# EAGLE board KV4QB DL WattMeter (EAGLE 7.0.0)
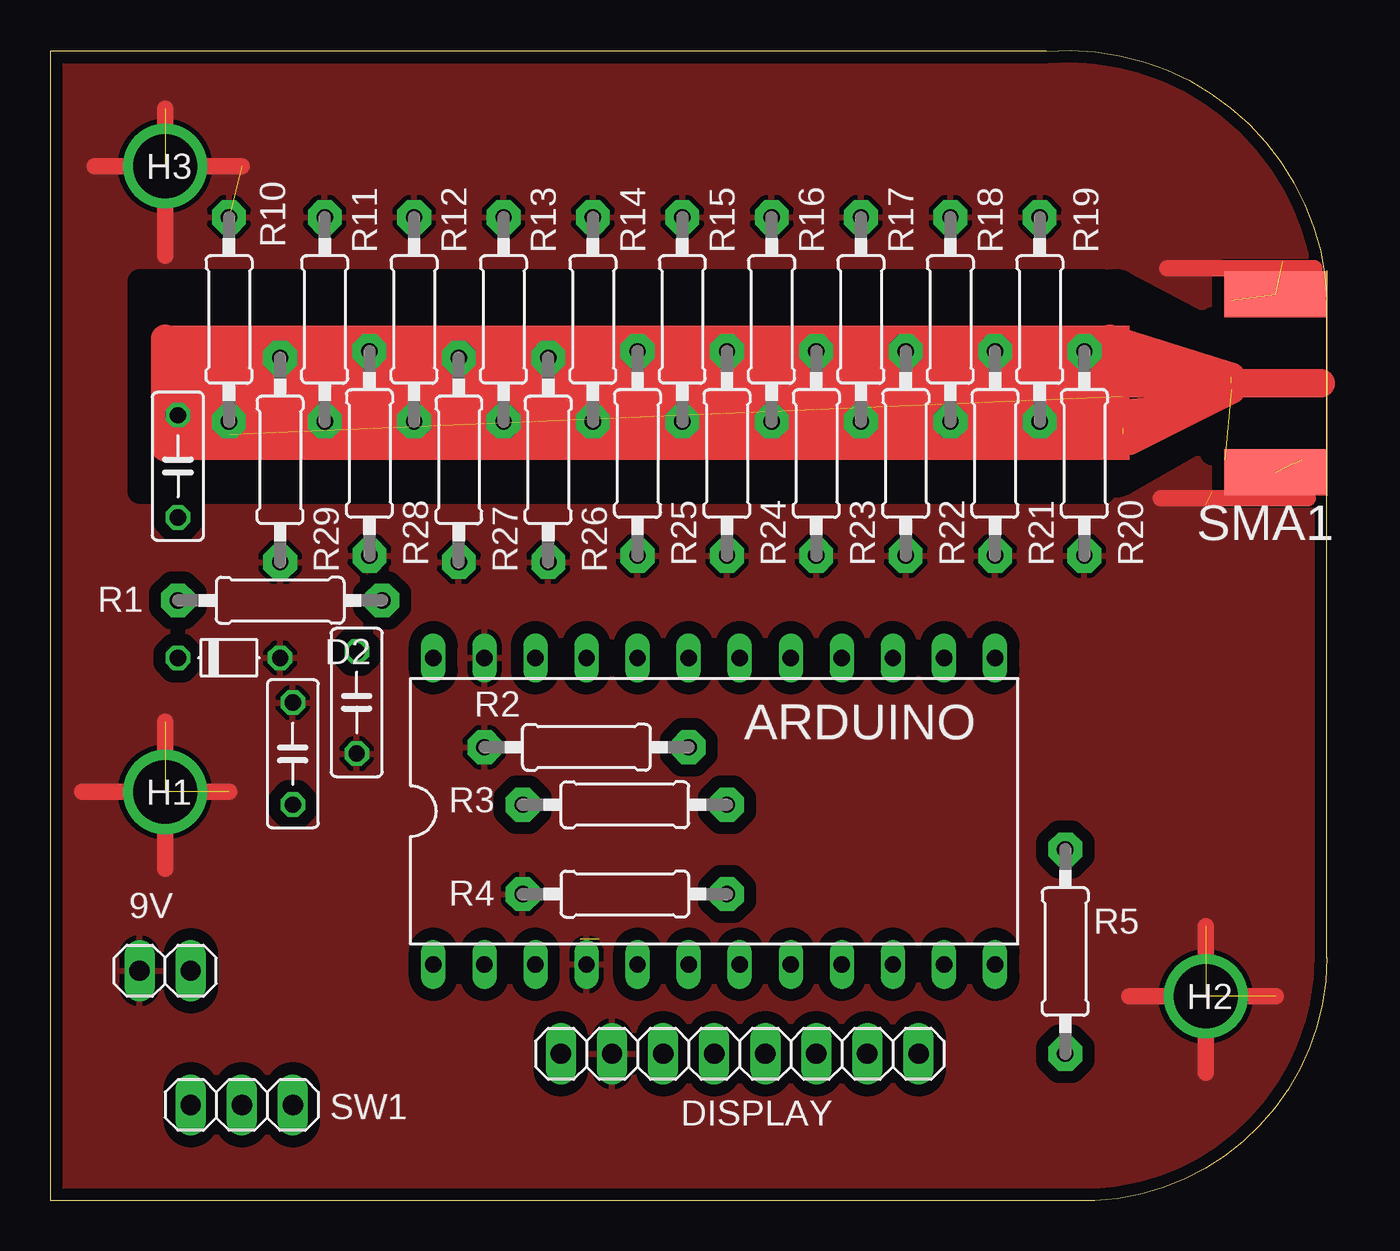
[diagram p0: board, top side]
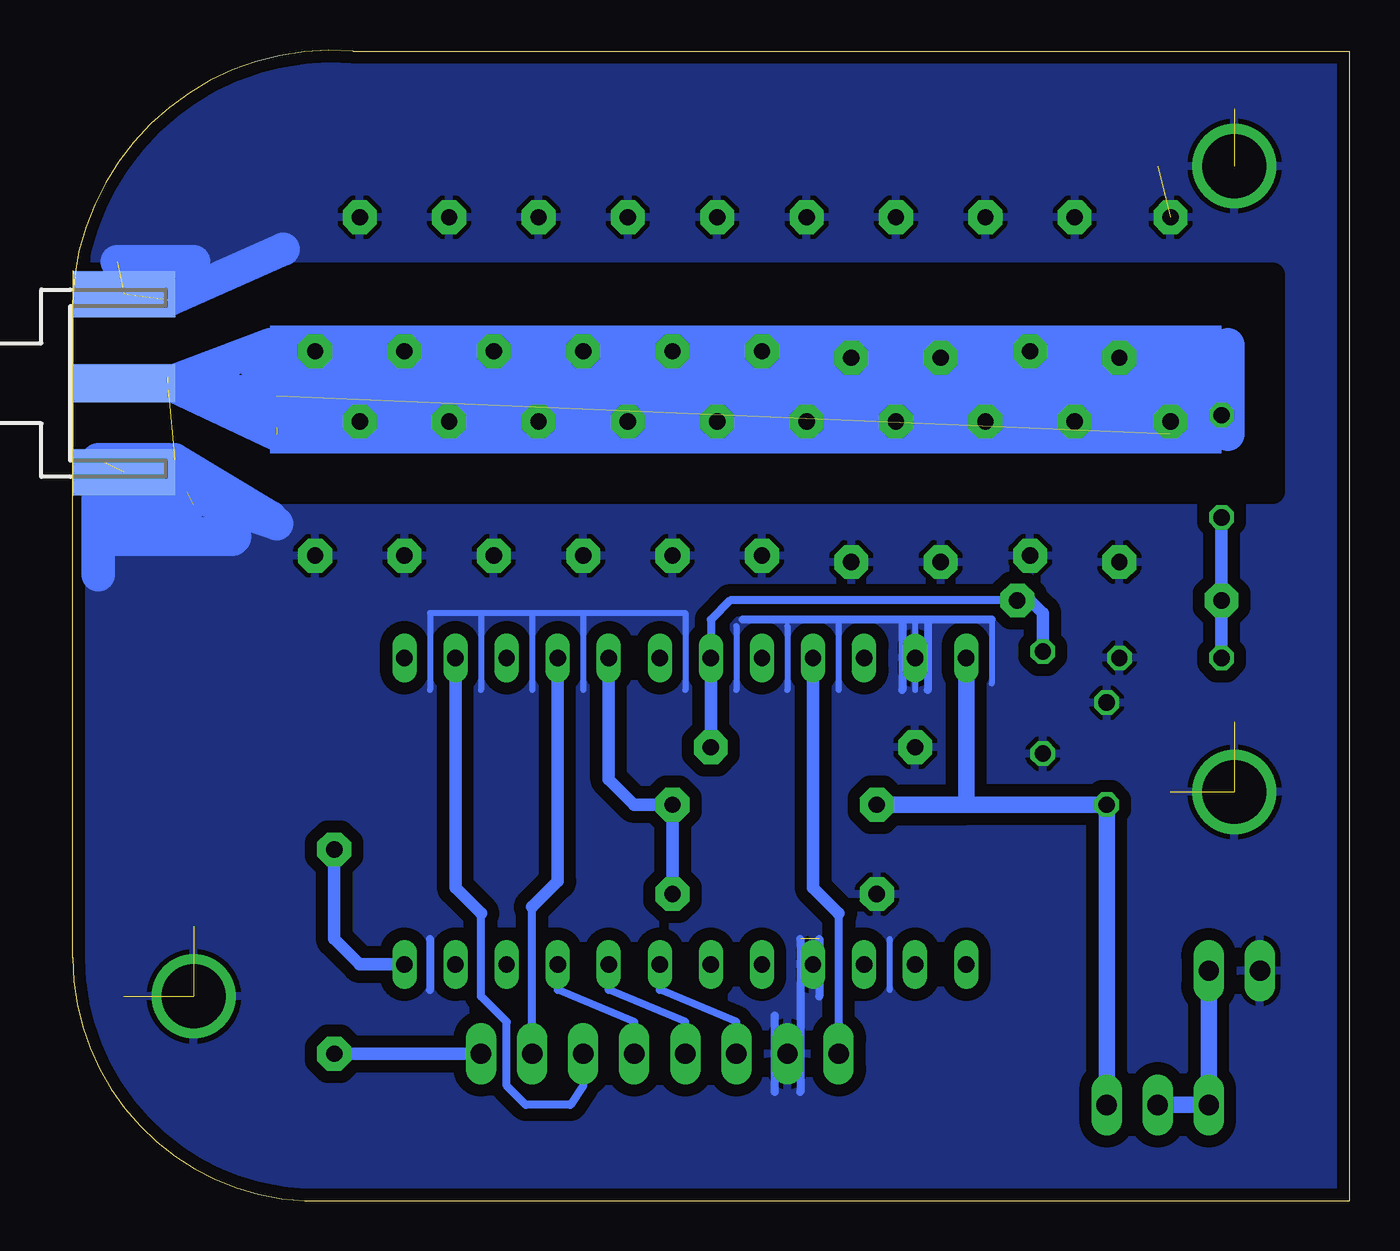
[diagram p1: board, bottom side, seen from below]

Size 63.5 x 57.2 mm. Coordinates in mm from the lower left corner, seen from the top.
Outline: 0,57.15 0,0 50.8,0 arc93 63.5,12.07 63.5,44.77 arc93 49.53,57.15 0,57.15
Copper layers (1*16): Top 0.0356mm / dielectric 1.5011mm / Bottom 0.0356mm
Design rules "LaenPCBOrder": minimum track width 6mil, minimum drill 13mil, track to track 6mil, track to pad 6mil, pad to pad 6mil, via to via 6mil, smd to smd 6mil, copper to edge 15mil, drill to drill 6mil, minimum pad ring 7mil, minimum via ring 7mil, stop-mask expansion 3mil, vias tented up to drill 0mil, thermal gap 10mil
tRestrict: area 57.8,37.1 to 63.2,43.8; area 4.4,35.2 to 52.4,45.7; 3 lines
bRestrict: area 3.8,35.2 to 62.2,46

## Footprints (pad centres in the part's own frame; a part is rotated, then mirrored left to right if it is on the bottom)
1X02 = drill 1.016 long: 1 -1.27,0; 2 1.27,0
DIL24-6 = drill 0.813 long: 1 -13.97,-7.62; 2 -11.43,-7.62; 3 -8.89,-7.62; 4 -6.35,-7.62; 5 -3.81,-7.62; 6 -1.27,-7.62; 7 1.27,-7.62; 8 3.81,-7.62; 9 6.35,-7.62; 10 8.89,-7.62; 11 11.43,-7.62; 12 13.97,-7.62; 13 13.97,7.62; 14 11.43,7.62; 15 8.89,7.62; 16 6.35,7.62; 17 3.81,7.62; 18 1.27,7.62; 19 -1.27,7.62; 20 -3.81,7.62; 21 -6.35,7.62; 22 -8.89,7.62; 23 -11.43,7.62; 24 -13.97,7.62
C050-025X075 = drill 0.813 octagon: 1 -2.54,0; 2 2.54,0
D-5 = drill 0.813 octagon: A 2.54,0; C -2.54,0
1X08 = drill 1.016 long: 1 -8.89,0; 2 -6.35,0; 3 -3.81,0; 4 -1.27,0; 5 1.27,0; 6 3.81,0; 7 6.35,0; 8 8.89,0
PAD_0.1250 = drill 3.175 pad 3.175: 1 0,0
0207/10 = drill 0.813 pad 1.676 octagon: 1 -5.08,0; 2 5.08,0
J502-ND-142-0711-871/876 = smd 5.08 x 1.905: 1 2.565,0 | smd 5.08 x 2.286: G@1 2.565,4.42; G@2 2.565,-4.42 | smd 5.08 x 2.286 bottom: G@3 2.565,4.42; G@4 2.565,-4.42
1X03 = drill 1.016 long: 1 -2.54,0; 2 0,0; 3 2.54,0

## Placement (x,y rotation side)
9V  [1X02]  5.71,11.43 180 top
ARDUINO  pro-mini  [DIL24-6]  33.02,19.37 0 top
C1  .1uf  [C050-025X075]  12.06,22.23 270 top
C4  .1uf  [C050-025X075]  15.24,24.77 90 top
C11  .001uf  [C050-025X075]  6.35,36.51 90 top
D2  1N60P  [D-5]  8.89,26.99 0 top
DISPLAY  [1X08]  34.29,7.3 0 top
H1  [PAD_0.1250]  5.71,20.32 0 top
H2  [PAD_0.1250]  57.47,10.16 0 top
H3  [PAD_0.1250]  5.71,51.44 0 top
R1  680K  [0207/10]  11.43,29.85 180 top
R2  68K  [0207/10]  26.67,22.54 0 top
R3  4K7  [0207/10]  28.57,19.69 0 top
R4  1k  [0207/10]  28.57,15.24 180 top
R5  100R  [0207/10]  50.48,12.38 90 top
R10  1K  [0207/10]  8.89,43.82 90 top
R11  1K  [0207/10]  13.65,43.82 90 top
R12  1K  [0207/10]  18.1,43.82 90 top
R13  1K  [0207/10]  22.54,43.82 90 top
R14  1K  [0207/10]  26.99,43.82 90 top
R15  1K  [0207/10]  31.43,43.82 90 top
R16  1K  [0207/10]  35.88,43.82 90 top
R17  1K  [0207/10]  40.32,43.82 90 top
R18  1K  [0207/10]  44.77,43.82 90 top
R19  1K  [0207/10]  49.21,43.82 90 top
R20  1K  [0207/10]  51.44,37.15 90 top
R21  1K  [0207/10]  46.99,37.15 90 top
R22  1K  [0207/10]  42.55,37.15 90 top
R23  1K  [0207/10]  38.1,37.15 90 top
R24  1K  [0207/10]  33.66,37.15 90 top
R25  1K  [0207/10]  29.21,37.15 90 top
R26  1K  [0207/10]  24.77,36.83 90 top
R27  1K  [0207/10]  20.32,36.83 90 top
R28  1K  [0207/10]  15.88,37.15 90 top
R29  1K  [0207/10]  11.43,36.83 90 top
SMA1  [J502-ND-142-0711-871/876]  63.5,40.64 0 bottom
SW1  [1X03]  9.52,4.76 0 top

## Library data of the parts
9V DISPLAY SW1 = pinhead
ARDUINO = ic-package
C1 C4 C11 R1-R5 R10-R29 = adafruit
D2 = diode
H1-H3 = special-drill
SMA1 = con-coax

## Nets
GND: 9V.2 ARDUINO.4 ARDUINO.23 C1.1 C4.1 D2.A DISPLAY.2 H1.1 H2.1 H3.1 R2.1 R4.2 R10.2 R11.2 R12.2 R13.2 R14.2 R15.2 R16.2 R17.2 R18.2 R19.2 R20.1 R21.1 R22.1 R23.1 R24.1 R25.1 R26.1 R27.1 R28.1 R29.1 SMA1.G@1 SMA1.G@2
S$1: 9V.1 SW1.2
S$5: DISPLAY.7
S$9: R5.2
S$10: DISPLAY.6
S$13: DISPLAY.5
S$14: C11.1 R1.2
S$15: C4.2 R1.1
S$34: DISPLAY.4
S$38: R5.1

## Tracks (layer width: path | path; a pad name or v marks a point on that pad's centre or on a via)
GND  (14 unrouted)
  Top 0.813: 2.22,51.44 9.52,51.44 | 1.59,20.32 8.89,20.32 | 53.66,10.16 60.96,10.16 | 57.47,6.35 57.47,13.65 | 5.71,16.51 5.71,23.81 | 5.71,46.99 5.71,54.29 | 62.86,46.36 55.56,46.36 | 62.55,34.93 55.25,34.93
  Top 1.422: 63.18,40.64 52.7,40.64 52.7,42.86 58.74,40.96 58.74,40.32 53.66,37.78
  Bottom 0.305: 45.72,25.4 45.72,29.21 43.18,29.21 | 22.86,13.02 22.86,10.48 | 27.94,28.58 27.94,25.4 | 25.4,28.89 25.4,25.4 | 38.1,29.21 38.1,25.4 | 40.64,29.21 40.64,25.4 | 43.18,29.21 43.18,25.4 | 40.64,29.21 43.18,29.21 | 21.59,28.89 21.59,25.4 | 30.48,28.58 30.48,25.4 | 33.02,25.4 33.02,29.21 38.1,29.21 | 38.1,29.21 40.64,29.21 | 17.78,28.89 17.78,25.72
  Bottom 0.406: 26.35,13.02 26.35,10.16 | 28.57,9.21 28.57,5.4 | 45.72,13.02 45.72,10.48 | 27.3,13.02 27.3,5.4 | 22.23,28.89 22.23,25.4 | 22.23,28.89 25.4,28.89 30.16,28.89 | 17.78,28.89 20.95,28.89 | 20.95,28.89 21.59,28.89 22.23,28.89 | 20.95,28.89 20.95,25.4
  Bottom 1.422: 57.47,34.61 62.23,34.61
  Bottom 1.676: 52.7,39.69 57.15,40.64 53.34,38.42 | 62.23,31.12 62.23,36.83 | 62.23,36.83 58.74,36.83 | 61.28,46.67 57.47,46.67 | 62.23,36.83 57.78,35.24 | 53.34,38.1 58.74,40.64 53.66,42.55 | 58.74,44.77 53.02,47.31 | 53.34,33.66 58.1,35.24 | 53.66,33.97 58.42,36.83
  Bottom 1.93: 55.56,33.02 61.28,33.02
  pour Bottom (isolate 0.61): -0.64,0 63.5,0 64.14,57.79 -0.64,57.79
  pour Top (isolate 0.61): 0,57.15 52.7,57.15 59.69,53.66 63.18,46.36 63.5,10.8 60.01,3.18 52.7,0 0,0
GND]  (1 unrouted)
  Bottom 1.676: 8.89,42.55 8.89,38.1 | 54.29,41.28 53.34,40.01
S$1
  Bottom 0.813: 9V.1 6.98,4.76 SW1.2
S$2
  Bottom 0.61: 6.35,29.85 6.35,26.99
S$3
  Bottom 0.813: 23.81,19.69 19.05,19.69
S$4
  Bottom 0.813: 12.06,4.76 12.06,19.69 19.05,19.69 19.05,26.99
S$5
  Bottom 0.406: DISPLAY.7 40.64,14.61
  Bottom 0.61: 40.64,14.61 39.37,15.88 39.37,26.99
S$6
  Bottom 1.676: 6.03,42.55 6.03,38.1
S$7
  Bottom 0.406: 25.4,14.29 25.4,7.3
  Bottom 0.61: 26.67,26.99 26.67,15.56 25.4,14.29
S$8
  Top 1.422: 5.71,42.86 5.71,37.47
S$9
  Bottom 0.61: R5.2 50.48,13.02 49.21,11.75 46.99,11.75
S$10
  Bottom 0.406: DISPLAY.6 38.1,5.72 38.73,4.76 40.96,4.76 41.91,5.72 41.91,8.89 43.18,10.16 43.18,14.29
  Bottom 0.61: 43.18,14.29 44.45,15.56 44.45,26.99
S$12
  Top 1.422: 52.39,39.05 56.2,39.37 54.29,41.59
S$13
  Bottom 0.406: DISPLAY.5 35.56,8.89 39.37,10.48 39.37,12.07
S$14
  Bottom 0.61: C11.1 R1.2
S$15
  Bottom 0.406: R1.1 30.8,29.85 31.75,28.89 31.75,27.31
  Bottom 0.61: 31.75,22.54 31.75,27.31 | C4.2 15.24,29.21 15.88,29.85 R1.1
S$28
  Bottom 0.61: 36.83,26.99 36.83,20.96 35.56,19.69 33.66,19.69 33.66,15.24
S$33
  Bottom 0.406: 30.48,7.3 30.48,8.89 34.29,10.48 34.29,12.07
S$34
  Bottom 0.406: DISPLAY.4 33.02,8.89 36.83,10.48 36.83,12.07
S$38
  Bottom 0.61: R5.1 43.18,7.3
(copper drawn outside any net)
  shapes: Bottom area x2, Top area x1